# Altium PCB Shield_MCXC444 - PCB.PcbDoc (part 3 of 3)
Units mm, origin at the board's own origin, x right, y up, seen from the top; angles counter-clockwise.
Board outline 100 x 55 mm, 2 copper layers (Top Layer, Bottom Layer); 120 components, 83 nets, 361 pads, 693 vias.
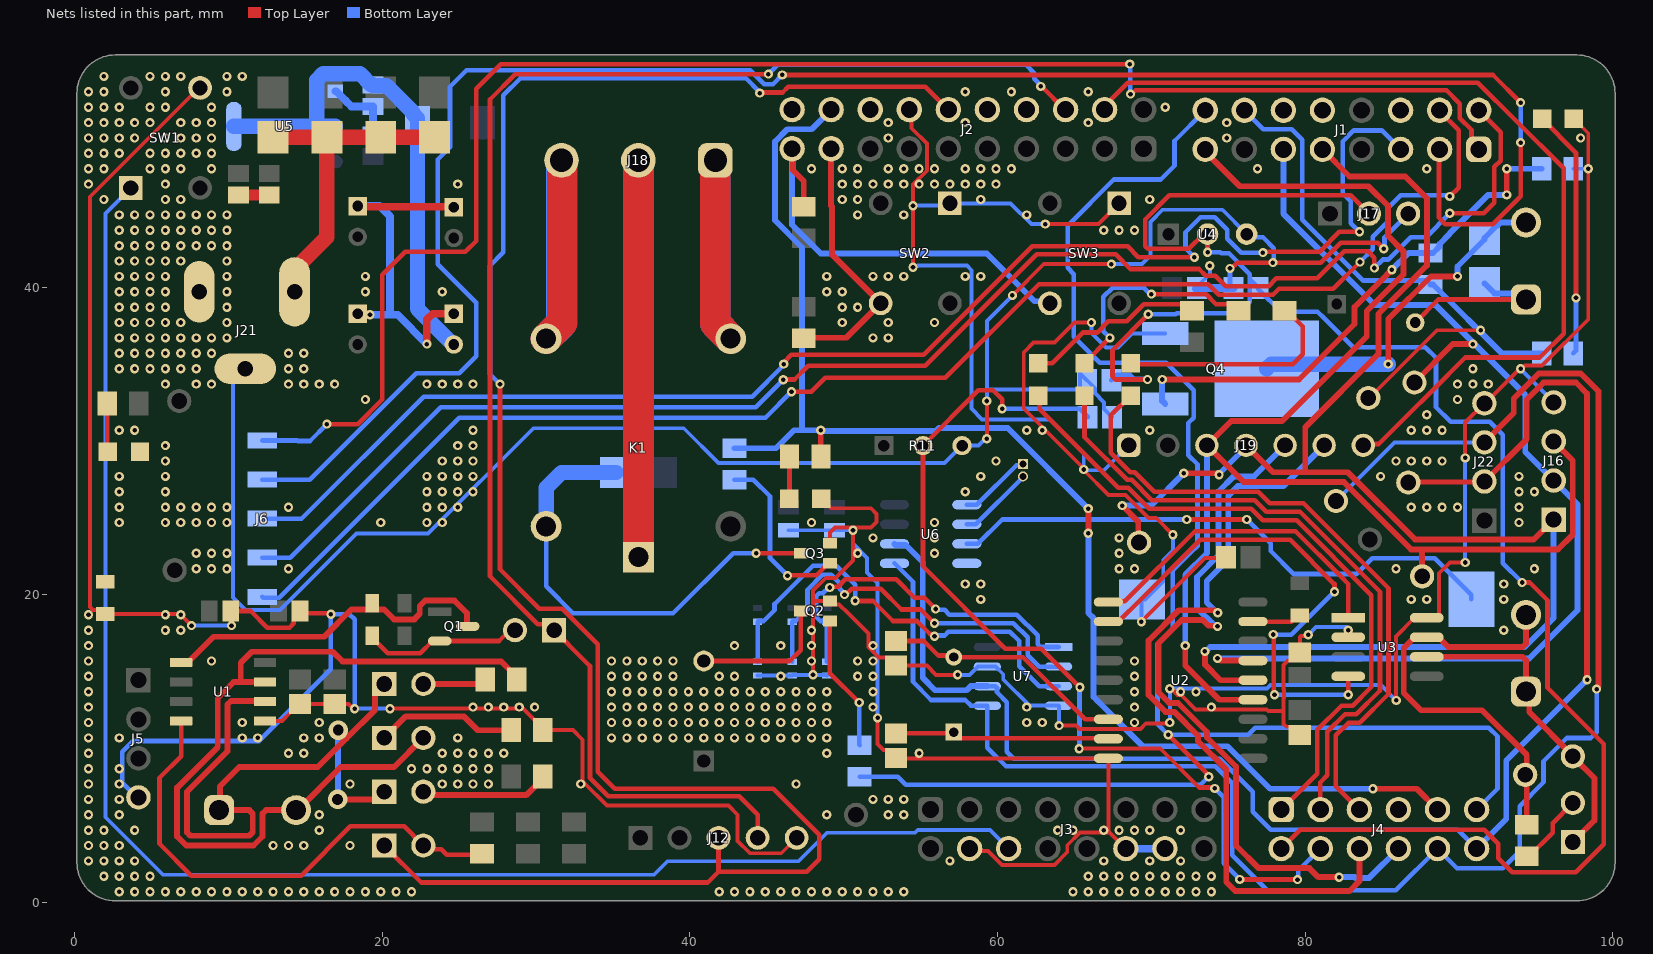
[diagram p2: the nets of this part, all layers, seen from the top]

## Via types
v1: diameter 0.6, hole 0.3, Top Layer to Bottom Layer, tented both sides, 543 vias
v2: diameter 0.6, hole 0.3, Top Layer to Bottom Layer, 148 vias
v3: diameter 1.27, hole 0.711, Top Layer to Bottom Layer, 2 vias

## Nets (pads, with @x,y where several pads share a name; then routed paths per layer and width w, separated by ;. In a path a pad name is that pad's centre, name@x,y a point inside that pad or via, vN(x,y) a via of type N, cw(c..) or ccw(c..) an arc to the next point about the centre after c; other vN are vias at no path point) (continued)
A0: R25.1 R28.2 U7.1 | length 23.2
  Top Layer w0.3: v2(49.088,20.473) 49.146,20.53 49.63,20.53 50.1,21 53.4,21 54.6,19.8 55.25,19.8 v2(55.971,19.079)
  Bottom Layer w0.3: R28.2@48.9,15.65 R25.1@48.9,18.25 48.85,18.3 48.465,18.3 48.196,18.569 48.196,19.896 48.408,20.108 48.642,20.108 49.007,20.473 v2(49.088,20.473) ; v2(55.971,19.079) 56.028,19.021 56.557,19.021 56.871,18.708 61.259,18.708 62.6,17.367 62.6,16.781 62.776,16.605 U7.1@63.968,16.605
A1: R26.1 R29.2 U7.2 | length 25.6
  Top Layer w0.3: v2(50.046,20.014) 50.127,20.014 50.513,20.4 52.4,20.4 53.754,19.046 55.008,19.046 v2(55.9,18.154)
  Bottom Layer w0.3: R29.2@46.65,15.65 R26.1@46.65,18.25 46.7,18.3 46.871,18.3 47.642,19.071 47.642,20.338 48.608,21.304 49.176,21.304 49.738,20.742 49.738,20.403 50.046,20.095 v2(50.046,20.014) ; v2(55.9,18.154) 61.029,18.154 61.954,17.229 61.954,16.081 62.7,15.335 U7.2@63.968,15.335
A2: R27.1 R30.2 U7.3 | length 29
  Top Layer w0.3: v2(50.74,19.616) 50.755,19.6 51.9,19.6 53.2,18.3 54.758,18.3 55.608,17.45 55.669,17.45 55.819,17.3 v2(55.9,17.3)
  Bottom Layer w0.3: R30.2@44.4,15.65 R27.1@44.4,18.25 44.45,18.3 44.8,18.3 45.5,19 45.5,19.4 48,21.9 49.5,21.9 50.74,20.66 v2(50.74,19.616) ; v2(55.9,17.3) 55.957,17.357 56.557,17.357 56.8,17.6 60.8,17.6 61.4,17 61.4,15.365 62.7,14.065 U7.3@63.968,14.065
AGND: C10.1 C11.1 C12.1 C13.1 C14.1 C15.2 C16.2 C17.1 C18.2 C19.2 C20.1 C21.1 D13.1 J17.3 J21.2 J21.3 R11.3 R24.1 U4.3 U5.1 | length 164.4
  Top Layer w0.254: v2(59.3,30.15) v2(59.3,32.6) ; v2(60.965,39.465) 63,41.5 v2(67.4,41.5)
  Top Layer w0.3: v2(75.109,41.218) 75.19,41.218 75.572,41.6 v2(77.9,41.6) 81.017,41.6 82.308,42.892 84.708,42.892 v2(85.1,42.5)
  Top Layer w0.5: C21.1@18.4,38.275 18.456,38.219 19.181,38.219 v2(19.2,38.2) ; C20.1@18.4,45.275 18.438,45.238 24.613,45.238 C14.1@24.65,45.2 ; v2(22.9,36.3) 22.9,37.9 23.275,38.275 C17.1@24.65,38.275
  Top Layer w0.7: C19.2@10.65,46 C18.2@12.65,46
  Bottom Layer w0.254: J21.3@11.1,34.7 10.3,33.9 10.3,19.82 11.097,19.023 13.353,19.023 18.315,23.985 22.985,23.985 29.827,30.827 39.596,30.827 41.852,28.571 56.561,28.571 R11.3@57.69,29.7 57.857,29.867 58.024,29.7 58.767,29.7 59.217,30.15 v2(59.3,30.15) ; v2(59.3,32.6) 59.3,33.352 ; v2(60.965,39.465) 59.3,37.8 59.3,33.352 ; v2(67.4,41.5) 69.4,41.5 69.95,42.05 69.95,44.25 70.731,45.031 74.609,45.031 U4.3@76.19,43.45 ; C13.1@67.45,31.55 66.927,32.073 66.927,32.509 66.323,33.113 66.323,33.427 65.35,34.4 65.35,33.425 65.277,33.352 59.3,33.352 ; C12.1@72.95,39.95 72.95,40.025 73.8,40.875 v2(73.8,41.4)
  Bottom Layer w0.3: v2(75.109,41.218) 75.109,40.191 C10.1@75.35,39.95 ; U4.3@76.19,43.45 76.4,43.24 77.256,43.24 77.954,42.542 77.954,41.654 v2(77.9,41.6) ; v2(85.1,42.5) 85.157,42.557 85.157,43.247 J17.3@86.69,44.78
  Bottom Layer w0.5: U5.1@16.945,52.74 17.011,52.74 17.621,52.13 17.621,52.104 17.975,51.75 C16.2@19.4,51.75 C15.2@19.4,49.9 ; C20.1@18.4,45.275 19.825,45.275 20.5,44.6 20.5,38.2 ; v2(19.2,38.2) 20.5,38.2 ; v2(22.9,36.3) 21,38.2 20.5,38.2 ; C14.1@24.613,45.238 C14.1@24.65,45.2 ; C12.1@72.9,39.9 C12.1@72.95,39.95 ; C12.1@73.15,39.95 C10.1@75.35,39.95
  other v1: 7.9,21.7 8.9,21.7 9.9,21.7 13.9,21.7 7.9,22.7 8.9,22.7 9.9,22.7 2.9,24.7 5.9,24.7 6.9,24.7 7.9,24.7 8.9,24.7 9.9,24.7 19.9,24.7 22.9,24.7 23.9,24.7 2.9,25.7 5.9,25.7 6.9,25.7 7.9,25.7 8.9,25.7 9.9,25.7 13.9,25.7 22.9,25.7 23.9,25.7 24.9,25.7 2.9,26.7 5.9,26.7 22.9,26.7 23.9,26.7 24.9,26.7 25.9,26.7 2.9,27.7 5.9,27.7 22.9,27.7 23.9,27.7 24.9,27.7 25.9,27.7 5.9,28.7 23.9,28.7 24.9,28.7 25.9,28.7 5.9,29.7 24.9,29.7 25.9,29.7 2.9,30.7 3.9,30.7 25.9,30.7 18.9,32.7 5.9,33.7 7.9,33.7 8.9,33.7 13.9,33.7 14.9,33.7 15.9,33.7 16.9,33.7 22.9,33.7 23.9,33.7 24.9,33.7 25.9,33.7 2.9,34.7 3.9,34.7 4.9,34.7 5.9,34.7 6.9,34.7 7.9,34.7 13.9,34.7 14.9,34.7 2.9,35.7 3.9,35.7 4.9,35.7 5.9,35.7 6.9,35.7 7.9,35.7 8.9,35.7 13.9,35.7 14.9,35.7 2.9,36.7 3.9,36.7 4.9,36.7 5.9,36.7 6.9,36.7 7.9,36.7 8.9,36.7 9.9,36.7 2.9,37.7 3.9,37.7 4.9,37.7 5.9,37.7 6.9,37.7 9.9,37.7 2.9,38.7 3.9,38.7 4.9,38.7 5.9,38.7 9.9,38.7 2.9,39.7 3.9,39.7 4.9,39.7 5.9,39.7 9.9,39.7 18.9,39.7 23.9,39.7 2.9,40.7 3.9,40.7 4.9,40.7 5.9,40.7 9.9,40.7 18.9,40.7 2.9,41.7 3.9,41.7 4.9,41.7 5.9,41.7 6.9,41.7 9.9,41.7 2.9,42.7 3.9,42.7 4.9,42.7 5.9,42.7 6.9,42.7 7.9,42.7 8.9,42.7 9.9,42.7 2.9,43.7 3.9,43.7 4.9,43.7 5.9,43.7 6.9,43.7 7.9,43.7 8.9,43.7 9.9,43.7 2.9,44.7 3.9,44.7 4.9,44.7 5.9,44.7 6.9,44.7 7.9,44.7 8.9,44.7 9.9,44.7 1.9,45.7 5.9,45.7 6.9,45.7 0.9,46.7 5.9,46.7 24.9,46.7 0.9,47.7 1.9,47.7 4.9,47.7 5.9,47.7 6.9,47.7 8.9,47.7 0.9,48.7 1.9,48.7 2.9,48.7 4.9,48.7 5.9,48.7 6.9,48.7 7.9,48.7 8.9,48.7 0.9,49.7 1.9,49.7 2.9,49.7 3.9,49.7 5.9,49.7 6.9,49.7 7.9,49.7 8.9,49.7 0.9,50.7 1.9,50.7 2.9,50.7 3.9,50.7 4.9,50.7 6.9,50.7 7.9,50.7 8.9,50.7 0.9,51.7 1.9,51.7 2.9,51.7 4.9,51.7 5.9,51.7 8.9,51.7 0.9,52.7 1.9,52.7 5.9,52.7 9.9,52.7 1.9,53.7 4.9,53.7 5.9,53.7 6.9,53.7 9.9,53.7 10.9,53.7
AREF: J2.16
CAN_N: J14.1 J15.1 TP8.1 U3.6 | length 20.8
  Top Layer w0.381: U3.6@87.9,15.97 94.127,15.97 94.35,15.747 J15.1@94.35,13.7 94.56,13.49 94.56,12.377 97.4,9.536 97.4,9.476 98.805,8.071 98.805,5.335 J14.1@97.4,3.93
CAN_P: J15.2 R10.1 TP7.1 U3.7 | length 27.6
  Top Layer w0.381: J15.2@94.35,18.7 94.35,16.828 94.127,16.605 89.295,16.605 88.66,17.24 87.102,17.24 86.407,16.546 86.407,13.616 87.523,12.5 91.495,12.5 94.4,9.595 94.4,8.3 R10.1@94.4,5.054
COMUN: J18.2 K1.1 | length 25.8
  Top Layer w2: K1.1@36.65,22.45 J18.2@36.65,48.25
DGND: BT1.1 C1.2 C2.2 C3.1 C4.1 C5.1 C6.1 C7.1 C8.1 C9.1 C22.2 C23.2 D5.1 D7.2 J2.14 J3.4 J3.12 J3.14 J5.4 J12.5 J16.4 J19.1 J22.4 Q2.2 Q3.2 Q4.3 R1.2 R22.2 R24.2 R28.1 R29.1 R30.1 SW1.4 SW2.1 SW3.1 U1.5 U2.9 U3.2 U3.8 U6.4 U7.4 U7.7 | length 414.5
  Top Layer w0.254: v2(7.6,18) 6.85,18.75 R24.2@2,18.75 1.731,19.019 1.188,19.019 1,19.208 1,45.879 8.071,52.95 SW1.4@8.15,52.95 ; C1.2@10.15,18.95 10.2,18.9 v2(10.2,18) ; U1.5@12.375,11.795 13.481,11.795 14.052,12.366 14.052,12.377 14.575,12.9 C4.1@14.65,12.9 C3.1@16.9,12.9 17.806,12.9 18.106,12.6 v2(18.2,12.6) ; v2(20.5,12.6) 20.518,12.618 29.158,12.618 30.425,11.35 R1.2@30.425,11.2 32.4,11.2 33.023,10.577 33.023,7.902 33.1,7.825 33.1,7.8 34.6,6.3 42.5,6.3 43.1,5.7 43.1,4 43.902,3.198 45.938,3.198 J12.5@46.94,4.2 ; v2(48,14.8) 48,19.5 ; D5.1@48.55,26.25 49.173,25.627 51.76,25.627 52.127,25.26 52.127,24.74 51.76,24.373 v2@50.6,24.373 ; Q3.2@49.1,23.35 49.1,24.047 49.426,24.373 v2@50.593,24.373 ; v2(50.6,24.2) 50.6,22.241 49.459,21.1 48.828,21.1 48,20.272 48,19.5 ; v2(52.2,12) 52.2,10.3 52.577,9.923 52.877,9.923 53.43,9.37 U2.9@67.2,9.37 67.2,4.64 67.288,4.552 ; J2.14@54.26,51.54 54.414,51.386 54.414,50.334 55.4,49.348 55.4,47.571 54.5,46.671 v2(54.5,45.3) v2(54.5,41.3) ; v2(57.4,14.8) 55.999,14.8 55.399,15.4 C9.1@53.4,15.4 52.877,15.923 52.277,15.923 51.6,16.6 51.6,17.475 50.298,18.777 49.698,19.377 49.323,19.377 Q2.2@49.1,19.6 48.1,19.6 48,19.5 ; J3.4@58.18,3.5 58.334,3.346 59.386,3.346 60.284,2.448 63.696,2.448 64.53,3.282 64.53,3.718 65.364,4.552 67.288,4.552 ; v2(63.1,44.1) 66.55,44.1 SW3.1@67.9,45.45 ; v2(64,11.5) 65.117,11.5 65.334,11.283 69.283,11.283 69.634,11.634 71.134,11.634 v2(71.2,11.7) ; v2(66.1,37.7) 65,37.7 63.7,36.4 62.338,36.4 61.7,35.762 61.7,32.1 65.6,28.2 v2(65.6,28.15) 65.6,28.1 67.207,26.493 68.307,26.493 69.817,24.983 70.317,24.983 v2(71.4,23.9) ; J3.12@68.34,3.5 67.288,4.552 ; v2(69.35,18.25) 69.35,18.263 73.487,22.4 74.7,22.4 74.75,22.45 C8.1@74.85,22.45 ; v2(71.2,13.9) 71.294,13.9 71.705,13.489 71.941,13.489 72.877,12.553 77.494,12.553 77.604,12.443 78.598,12.443 ; C7.1@79.65,10.9 79.127,11.423 78.776,11.423 78.598,11.601 78.598,12.443 ; v2(80.2,17.4) 80.134,17.334 79.733,17.334 79.65,17.251 C6.1@79.65,16.25 79.127,15.727 78.89,15.727 78.598,15.435 78.598,13.865 78.627,13.836 78.627,13.314 78.598,13.285 78.598,12.443 ; U3.2@82.798,17.24 82.8,17.242 v2(82.8,17.7) ; v2(85.912,13.134) 85.89,13.157 85.89,17.298 87.102,18.51 U3.8@87.9,18.51 88.536,18.51 88.7,18.674 88.7,21.4 89.4,22.1 v2(90.4,22.1) ; v2(90.4,28.9) 90.4,31.2 J22.4@91.65,32.45 91.7,32.45 v2@93.95,34.7 ; v2(94,34.7) 94.094,34.7 94.294,34.9 95.4,34.9 98.4,37.9 v2(98.4,47.7) 98.4,50.007 D7.2@97.457,50.95
  Top Layer w0.3: C1.2@10.15,18.95 11.454,18.95 12.533,17.871 13.967,17.871 14.25,18.154 14.25,18.55 C2.2@14.65,18.95 14.8,18.8 15.91,18.8 15.912,18.798 16.602,18.798 v2(16.66,18.74)
  Bottom Layer w0.254: v2(7.6,18) v2(10.2,18) ; v2(18.2,12.6) v2(20.5,12.6) ; R30.1@44.4,14.75 R29.1@46.65,14.75 46.675,14.775 47.975,14.775 v2(48,14.8) 48.025,14.775 48.875,14.775 R28.1@48.9,14.75 ; C23.2@46.4,24.2 C22.2@49.4,24.2 v2(50.6,24.2) 50.6,23.326 51.523,22.403 51.523,21.454 52.2,20.777 v2(52.2,12) ; v2(54.5,41.3) 54.566,41.366 54.788,41.366 54.822,41.4 58,41.4 58.3,41.1 58.3,32.1 59,31.4 63.4,31.4 65.6,29.2 v2(65.6,28.15) 65.65,28.1 66.915,28.1 J19.1@68.53,29.715 ; v2(54.5,45.3) 56.75,45.3 SW2.1@56.9,45.45 60.85,45.45 62.2,44.1 v2(63.1,44.1) ; v2(57.4,14.8) 58.18,14.8 58.715,15.335 U7.7@59.332,15.335 59.872,15.335 60.369,14.838 60.369,14.494 62.068,12.795 U7.4@63.968,12.795 64,12.763 v2(64,11.5) ; v2(66.1,37.7) 66.1,37.013 67.04,36.073 67.826,36.073 68.739,36.986 Q4.3@70.898,36.986 ; v2(69.35,18.25) 69.35,19.65 BT1.1@69.4,19.7 69.6,19.7 70.773,20.873 70.773,22.273 71.4,22.9 v2(71.4,23.9) ; v2(71.2,11.7) v2(71.2,13.9) ; v2@71.25,13.85 71.31,13.85 71.36,13.9 77.513,13.9 77.74,14.127 84.92,14.127 v2(85.912,13.134) ; v2(80.2,17.4) 80.7,17.9 82.651,17.9 82.8,17.751 v2(82.8,17.7) ; v2(90.4,22.1) v2(90.4,28.9) ; v2(94,34.7) 94,34.68 96.15,32.53 J16.4@96.15,32.51 ; R22.2@97.425,47.7 v2(98.4,47.7)
  Bottom Layer w0.3: J5.4@4.15,6.83 4.07,6.83 3.105,7.795 3.105,9.805 3.8,10.5 12,10.5 16.65,15.15 16.65,18.731 v2(16.66,18.74) ; v2@16.6,18.8 v2(16.66,18.74) ; v2(18.2,12.6) 18.2,18.4 17.86,18.74 v2(16.66,18.74)
  Bottom Layer w0.5: J3.12@68.34,3.5 J3.14@70.88,3.5
  other v1: 2.9,0.7 3.9,0.7 4.9,0.7 5.9,0.7 6.9,0.7 7.9,0.7 8.9,0.7 9.9,0.7 10.9,0.7 11.9,0.7 12.9,0.7 13.9,0.7 14.9,0.7 15.9,0.7 16.9,0.7 17.9,0.7 18.9,0.7 19.9,0.7 20.9,0.7 21.9,0.7 41.9,0.7 42.9,0.7 43.9,0.7 44.9,0.7 45.9,0.7 46.9,0.7 47.9,0.7 48.9,0.7 49.9,0.7 50.9,0.7 51.9,0.7 52.9,0.7 53.9,0.7 64.9,0.7 65.9,0.7 66.9,0.7 67.9,0.7 68.9,0.7 69.9,0.7 70.9,0.7 71.9,0.7 72.9,0.7 73.9,0.7 1.9,1.7 2.9,1.7 3.9,1.7 4.9,1.7 65.9,1.7 66.9,1.7 67.9,1.7 68.9,1.7 69.9,1.7 70.9,1.7 71.9,1.7 72.9,1.7 73.9,1.7 0.9,2.7 1.9,2.7 2.9,2.7 3.9,2.7 56.9,2.7 66.9,2.7 69.9,2.7 71.9,2.7 0.9,3.7 1.9,3.7 2.9,3.7 12.9,3.7 13.9,3.7 14.9,3.7 17.9,3.7 0.9,4.7 1.9,4.7 3.9,4.7 15.9,4.7 63.9,4.7 64.9,4.7 66.9,4.7 67.9,4.7 68.9,4.7 69.9,4.7 71.9,4.7 0.9,5.7 2.9,5.7 15.9,5.7 48.9,5.7 52.9,5.7 53.9,5.7 0.9,6.7 2.9,6.7 51.9,6.7 52.9,6.7 53.9,6.7 0.9,7.7 2.9,7.7 17.9,7.7 23.9,7.7 24.9,7.7 25.9,7.7 26.9,7.7 32.9,7.7 46.9,7.7 0.9,8.7 2.9,8.7 21.9,8.7 22.9,8.7 23.9,8.7 24.9,8.7 25.9,8.7 26.9,8.7 0.9,9.7 13.9,9.7 14.9,9.7 23.9,9.7 24.9,9.7 25.9,9.7 26.9,9.7 27.9,9.7 48.9,9.7 54.9,9.7 0.9,10.7 2.9,10.7 10.9,10.7 11.9,10.7 14.9,10.7 15.9,10.7 24.9,10.7 34.9,10.7 35.9,10.7 36.9,10.7 37.9,10.7 38.9,10.7 39.9,10.7 40.9,10.7 41.9,10.7 42.9,10.7 43.9,10.7 44.9,10.7 45.9,10.7 46.9,10.7 47.9,10.7 48.9,10.7 0.9,11.7 10.9,11.7 15.9,11.7 34.9,11.7 35.9,11.7 36.9,11.7 37.9,11.7 38.9,11.7 39.9,11.7 40.9,11.7 41.9,11.7 42.9,11.7 43.9,11.7 44.9,11.7 45.9,11.7 46.9,11.7 47.9,11.7 48.9,11.7 61.9,11.7 62.9,11.7 68.9,11.7 0.9,12.7 25.9,12.7 26.9,12.7 27.9,12.7 28.9,12.7 29.9,12.7 34.9,12.7 35.9,12.7 36.9,12.7 37.9,12.7 38.9,12.7 39.9,12.7 40.9,12.7 41.9,12.7 42.9,12.7 43.9,12.7 44.9,12.7 45.9,12.7 46.9,12.7 47.9,12.7 48.9,12.7 51.9,12.7 61.9,12.7 68.9,12.7 73.9,12.7 0.9,13.7 34.9,13.7 35.9,13.7 36.9,13.7 37.9,13.7 38.9,13.7 39.9,13.7 40.9,13.7 41.9,13.7 42.9,13.7 43.9,13.7 44.9,13.7 45.9,13.7 46.9,13.7 47.9,13.7 48.9,13.7 51.9,13.7 68.9,13.7 71.9,13.7 72.9,13.7 0.9,14.7 34.9,14.7 35.9,14.7 36.9,14.7 37.9,14.7 38.9,14.7 41.9,14.7 42.9,14.7 45.9,14.7 50.9,14.7 51.9,14.7 68.9,14.7 0.9,15.7 8.9,15.7 34.9,15.7 35.9,15.7 36.9,15.7 37.9,15.7 38.9,15.7 47.9,15.7 50.9,15.7 51.9,15.7 68.9,15.7 0.9,16.7 42.9,16.7 45.9,16.7 47.9,16.7 51.9,16.7 0.9,17.7 5.9,17.7 6.9,17.7 47.9,17.7 92.9,17.7 0.9,18.7 5.9,18.7 6.9,18.7 58.9,19.7 86.9,19.7 87.9,19.7 92.9,19.7 57.9,20.7 58.9,20.7 92.9,20.7 67.9,21.7 68.9,21.7 85.9,21.7 94.9,21.7 50.9,22.7 55.9,22.7 67.9,22.7 51.9,23.7 55.9,23.7 67.9,23.7 47.9,24.7 55.9,24.7 93.9,24.7 86.9,25.7 87.9,25.7 88.9,25.7 89.9,25.7 93.9,25.7 57.9,26.7 93.9,26.7 94.9,26.7 58.9,27.7 84.9,27.7 93.9,27.7 59.9,28.7 85.9,28.7 86.9,28.7 87.9,28.7 88.9,28.7 61.9,30.7 62.9,30.7 69.9,30.7 86.9,30.7 87.9,30.7 88.9,30.7 87.9,31.7 89.9,32.7 89.9,33.7 90.9,33.7 91.9,33.7 90.9,34.7 51.9,36.7 52.9,36.7 49.9,37.7 52.9,37.7 55.9,37.7 49.9,38.7 50.9,38.7 48.9,39.7 49.9,39.7 48.9,40.7 51.9,40.7 52.9,40.7 53.9,40.7 57.9,40.7 58.9,40.7 66.9,43.7 67.9,43.7 68.9,43.7 50.9,44.7 53.9,44.7 61.9,44.7 49.9,45.7 50.9,45.7 58.9,45.7 69.9,45.7 49.9,46.7 50.9,46.7 51.9,46.7 52.9,46.7 53.9,46.7 54.9,46.7 55.9,46.7 56.9,46.7 57.9,46.7 58.9,46.7 59.9,46.7 47.9,47.7 49.9,47.7 50.9,47.7 52.9,47.7 53.9,47.7 54.9,47.7 55.9,47.7 57.9,47.7 58.9,47.7 59.9,47.7 60.9,47.7 76.9,47.7 87.9,47.7 52.9,49.7 74.9,49.7 97.9,49.7 52.9,50.7 57.9,50.7 65.9,50.7 74.9,50.7 70.9,51.7 57.9,52.7 60.9,52.7 65.9,52.7
MISO: J1.11 J16.2 TP2.1 U2.15 | length 72.1
  Top Layer w0.381: v2(74.3,15.864) 74.359,15.864 74.503,15.72 U2.15@76.6,15.72 ; TP2.1@87.1,33.8 89.6,36.3 v2(90.9,36.3)
  Bottom Layer w0.381: v2(74.3,15.864) 94.564,15.864 97.7,19 97.7,25.88 J16.2@96.15,27.43 94.3,29.28 94.3,33 88.45,38.85 84.509,38.85 78.58,44.779 J1.11@78.58,48.96
MOSI: J1.9 J16.1 J19.4 TP1.1 U2.14 | length 99.4
  Top Layer w0.381: v2(68.1,25.8) 69.144,24.756 69.144,23.456 TP1.1@69.2,23.4 ; v2(72.1,27.9) 74.3,27.9 v2(74.4,27.8) ; v2(73.476,16.324) 73.495,16.305 73.495,15.452 74.497,14.45 U2.14@76.6,14.45 ; J19.4@76.15,29.715 77.901,27.965 80,27.965 ; J1.9@81.12,48.96 82.88,47.2 86.5,47.2 87.919,45.781 87.919,41.42 84.765,38.265 84.765,35.665 80,30.9 80,27.965 ; J16.1@96.15,24.89 94.851,23.591 87.146,23.591 82.772,27.965 80,27.965
  Bottom Layer w0.381: v2(68.1,25.8) 70,25.8 v2(72.1,27.9) ; v2(73.476,16.324) 73.536,16.324 73.821,16.609 94.266,16.609 96.15,18.492 J16.1@96.15,24.89 ; v2(74.4,27.8) 74.4,27.859 76.15,29.609 J19.4@76.15,29.715
NA: J18.1 K1.3 | length 24
  Top Layer w2: J18.1@41.65,48.25 41.65,37.65 K1.3@42.65,36.65
  Bottom Layer w2: J18.1@41.65,48.25 41.65,37.65 K1.3@42.65,36.65
NC: J18.3 K1.4 | length 24.1
  Top Layer w2: K1.4@30.65,36.65 31.7,37.7 31.7,48.023 31.698,48.025 31.698,48.202 J18.3@31.65,48.25
  Bottom Layer w2: K1.4@30.65,36.65 31.65,37.65 J18.3@31.65,48.25
NetBT1_2: BT1.2 U6.3 | length 36.9
  Top Layer w0.3: v2(72.296,24.9) v2(76.2,24.9)
  Bottom Layer w0.3: U6.3@58,23.315 58.715,23.315 60.296,24.896 67.292,24.896 67.296,24.9 v2(72.296,24.9) ; v2(76.2,24.9) 77.758,23.342 77.758,22.851 79.259,21.35 83.315,21.35 84.354,22.389 88.411,22.389 90.8,20 BT1.2@90.8,19.7
NetC16_1: C16.1 C17.2 D10.1 U5.2 U5.4 | length 33.3
  Bottom Layer w1: U5.4@10.355,50.45 15.8,50.45 ; U5.2@16.945,50.45 15.8,50.45 ; C17.2@24.65,36.275 24.601,36.275 22.29,38.586 D10.1@22.29,50.7 22.29,50.98 21.98,51.29 21.98,51.385 20.265,53.1 19.45,53.1 C16.1@19.4,53.15 19.275,53.15 18.549,53.876 16.153,53.876 15.743,53.466 15.743,50.507 15.8,50.45
NetD1_2: D1.2 K1.5 Q3.3 | length 30.3
  Top Layer w0.3: v2(44.3,22.704) 44.302,22.702 47.198,22.702 Q3.3@47.2,22.7
  Bottom Layer w0.3: K1.5@30.65,24.45 30.65,20.55 32.4,18.8 38.9,18.8 42.804,22.704 v2(44.3,22.704)
  Bottom Layer w1: K1.5@30.65,24.45 30.65,26.95 31.65,27.95 D1.2@35.2,27.95
NetD2_2: D2.2 R15.1 | length 11.8
  Top Layer w0.3: D2.2@62.65,35.05 63.55,35.05 65.55,37.05 66.469,37.05 67.195,37.776 68.386,37.776 69.51,38.9 72.225,38.9 R15.1@72.65,38.475
NetD3_2: D3.2 R16.1 | length 14.8
  Top Layer w0.3: D3.2@65.65,35.05 v2(67.3,36.7) ; v2(70,39.55) 70.002,39.548 73.555,39.548 74.203,38.9 75.225,38.9 R16.1@75.65,38.475
  Bottom Layer w0.3: v2(67.3,36.7) 67.3,36.726 66.88,37.146 66.88,39.372 67.478,39.97 69.499,39.97 69.919,39.55 v2(70,39.55)
NetD4_2: D4.2 R17.1 | length 14.9
  Top Layer w0.3: D4.2@68.65,35.05 68.7,35 71.069,35 71.073,34.996 79.199,34.996 79.832,35.63 79.832,37.444 78.8,38.475 R17.1@78.65,38.475
NetD5_2: D5.2 R19.1 | length 2.8
  Top Layer w0.3: D5.2@46.45,26.25 46.475,26.275 R19.1@46.475,29
NetD6_1: D6.1 F1.2 J20.1 | length 11
  Top Layer w0.3: F1.2@87.15,37.7 88.65,39.2 J20.1@94.35,39.2
  Bottom Layer w0.381: D6.1@91.65,40.25 92.3,39.6 93.95,39.6 J20.1@94.35,39.2
NetD6_2: D6.2 J20.2 Q4.4 | length 22.9
  Top Layer w0.381: v2(85.4,35) 85.4,37.927 88.173,40.7 v2(89.9,40.7)
  Bottom Layer w0.381: v2(89.9,40.7) 89.9,41.35 91.65,43.1 91.65,43.2 92.46,44.01 92.51,44.01 92.7,44.2 J20.2@94.35,44.2
  Bottom Layer w1: Q4.4@77.498,34.7 77.797,35 v2(85.4,35)
NetD7_1: D7.1 R21.2 | length 16.2
  Top Layer w0.3: D7.1@95.4,50.95 97.6,48.75 v2(97.6,39.3)
  Bottom Layer w0.3: R21.2@97.425,35.7 97.6,35.875 v2(97.6,39.3)
NetD8_2: D8.2 D9.2 D11.2 D12.2 J21.1 | length 21.4
  Top Layer w1: D8.2@12.9,49.75 D9.2@16.4,49.75 ; J21.1@14.3,39.7 14.3,41.15 16.4,43.25 D9.2@16.4,49.75 ; D12.2@23.4,49.75 D11.2@19.9,49.75 D9.2@16.4,49.75
NetD13_2: D13.2 R23.1 | length 3.2
  Top Layer w0.3: R23.1@2.125,32.45 2.131,32.444 2.131,29.319 D13.2@2.15,29.3
NetJ7_2: J7.2 R5.2 | length 4.2
  Top Layer w0.381: J7.2@22.67,14.2 26.399,14.2 R5.2@26.699,14.5
NetJ9_1: J9.1 R1.1 | length 9.2
  Top Layer w0.381: J9.1@20.13,10.7 21.53,12.1 25.3,12.1 26.2,11.2 R1.1@28.375,11.2
NetJ10_2: J10.2 R2.1 U1.4 | length 32.5
  Top Layer w0.3: U1.4@6.925,11.795 6.925,9.508 5.517,8.1 5.517,3.819 7.594,1.742 14.725,1.742 17.929,4.946 21.424,4.946 J10.2@22.67,3.7 22.913,3.457 23.843,3.457 24.2,3.1 26.397,3.1 R2.1@26.472,3.175
NetJ11_2: J11.2 R6.2 | length 8.4
  Top Layer w0.381: J11.2@22.67,7.2 22.893,6.977 29.353,6.977 30.425,8.05 R6.2@30.425,8.2
NetJ13_2: J13.2 Q1.2 R7.1 | length 10.5
  Top Layer w0.3: R7.1@19.35,17.35 19.35,17.2 20.35,16.2 22.467,16.2 23.267,17 Q1.2@23.74,17 27.586,17 28.286,17.7 J13.2@28.63,17.7
NetJ14_2: J14.2 R10.2 | length 4.8
  Top Layer w0.3: R10.2@94.4,3.003 94.55,3.003 96.093,4.545 96.093,5.163 J14.2@97.4,6.47
NetLS1_2: LS1.2 Q2.3 | length 9.3
  Top Layer w0.3: LS1.2@40.9,15.7 46.5,15.7 47.2,16.4 47.2,18.85 47.1,18.95 Q2.3@47.2,18.95
NetQ2_1: Q2.1 R12.1 | length 8.9
  Top Layer w0.3: Q2.1@49.1,18.3 49.1,14.9 v2(51,13)
  Bottom Layer w0.3: v2(51,13) 51,10.254 R12.1@51.028,10.225
NetQ3_1: Q3.1 R18.1 | length 11.5
  Top Layer w0.3: v2(46.346,21.242) 46.383,21.278 48.228,21.278 49,22.05 Q3.1@49.1,22.05
  Bottom Layer w0.3: R18.1@42.9,27.475 44.128,27.475 45.209,26.394 45.209,22.38 v2(46.346,21.242)
NetQ4_1: Q4.1 R20.1 R22.1 | length 33.8
  Top Layer w0.381: v2(70.7,34) 79.6,34 83.2,37.6 83.2,38.7 84.933,40.433 ; 84.933,40.435 v2(85.634,41.135) ; v2(93.1,46) v2(93.1,47.7)
  Bottom Layer w0.381: v2(70.7,34) 70.7,32.612 Q4.1@70.898,32.414 ; v2(85.634,41.135) 86.724,42.225 88.3,42.225 88.738,42.663 88.738,42.813 89.4,43.475 89.4,43.502 91.898,46 v2(93.1,46) ; v2(93.1,47.7) R22.1@95.375,47.7
NetR9_1: R9.1 U2.17 | length 3.2
  Top Layer w0.3: U2.17@76.6,18.26 79.11,18.26 79.5,18.65 R9.1@79.65,18.65
NetU2_1: U2.1 U3.1 | length 21.1
  Top Layer w0.3: U2.1@67.2,19.53 67.24,19.57 68.27,19.57 72.833,24.133 79.367,24.133 82.3,21.2 82.798,20.702 U3.1@82.798,18.51
NetU2_2: U2.2 U3.4 | length 34.5
  Top Layer w0.3: U2.2@67.2,18.26 67.85,18.26 68.566,18.976 68.576,18.976 73.179,23.579 79.021,23.579 81.9,20.7 v2(81.9,20.2) ; v2(77.927,17.417) 77.963,17.38 77.963,13.537 v2(78,13.5) ; U3.4@82,14.7 U3.4@82.798,14.7 82.8,14.698 v2(82.8,13.5)
  Bottom Layer w0.3: v2(77.927,17.417) 77.943,17.4 79.1,17.4 v2(81.9,20.2) ; v2(78,13.5) v2(82.8,13.5)
NetU6_1: U6.1 Y2.1 | length 4.7
  Bottom Layer w0.3: U6.1@58,25.855 58.655,25.855 61.229,28.429 61.579,28.429 Y2.1@61.65,28.5
NetU6_2: U6.2 Y2.2 | length 5
  Bottom Layer w0.3: U6.2@58,24.585 58.585,24.585 61.65,27.65 Y2.2@61.65,27.7
OSC1: C5.2 U2.8 Y1.1 | length 14
  Top Layer w0.3: C5.2@53.4,11 57.08,11 Y1.1@57.15,11.07 57.55,10.67 67.17,10.67 U2.8@67.2,10.64
OSC2: C9.2 U2.7 Y1.2 | length 15.9
  Top Layer w0.3: C9.2@53.4,17 55.204,17 56.15,16.054 57.046,16.054 Y1.2@57.15,15.95 61.65,15.95 65.69,11.91 U2.7@67.2,11.91
PTA1: J1.2 J6.4 | length 99.5
  Top Layer w0.3: v2(46.064,33.982) 46.081,34 46.8,34 47.7,34.9 55.294,34.9 62.544,42.15 67.669,42.15 68.635,41.184 73.097,41.184 73.531,40.75 74.15,40.75 74.829,40.071 77.625,40.071 78.125,40.571 80.771,40.571 82.538,42.338 84.087,42.338 84.5,41.924 v2(84.5,41.25) ; v2(89.4,44.8) 91.6,44.8 92.3,45.5 92.3,47.819 92.7,48.219 92.7,50.08 J1.2@91.28,51.5
  Bottom Layer w0.3: J6.4@12.187,22.41 14.01,22.41 23.8,32.2 41.974,32.2 41.977,32.203 43.823,32.203 43.826,32.2 44.281,32.2 v2(46.064,33.982) ; v2(84.5,41.25) 85.046,41.796 85.392,41.796 86.853,43.257 87.857,43.257 v2(89.4,44.8)
PTA2: J1.4 J6.5 | length 96
  Top Layer w0.3: v2(46.6,33.2) 47.9,33.2 48.8,34.1 56.596,34.1 62.696,40.2 73.686,40.2 74.369,39.517 77.907,39.517 78.294,39.904 81.832,39.904 v2(83.562,41.634) ; J1.4@88.74,51.5 88.74,51.42 89.969,50.191 89.969,46.469 v2(89.4,45.9)
  Bottom Layer w0.3: J6.5@12.187,19.87 12.257,19.8 13.3,19.8 25.016,31.516 44.916,31.516 v2(46.6,33.2) ; v2(83.562,41.634) 84.396,42.468 84.396,43.269 85.339,44.212 85.339,45.11 86.198,45.969 89.25,45.969 89.319,45.9 v2(89.4,45.9)
PTA4: J1.10
PTA5: J1.12
PTB0: C10.2 C11.2 J4.2 J17.2 U4.2 | length 121
  Top Layer w0.3: v2(69.75,34) 67.646,34 67.47,34.176 67.47,35.906 v2(69.8,38.236) ; U4.2@73.486,43.45 73.386,43.45 72.432,42.496 69.776,42.496 69.6,42.672 69.6,44.4 71.169,45.969 82.961,45.969 J17.2@84.15,44.78 ; v2@73.65,42.278 U4.2@73.65,43.45 ; J4.2@78.44,3.5 79.669,4.729 91.649,4.729 92.552,3.826 92.552,2.874 93.455,1.971 97.582,1.971 99.4,3.789 99.4,10.3 95.75,13.95 95.75,19.65 94.6,20.8 v2(94.1,20.8)
  Bottom Layer w0.3: C11.2@67.4,33.95 67.75,34.3 68.6,34.3 68.85,34.05 69.7,34.05 v2(69.75,34) ; v2(69.8,38.236) 71.577,38.236 71.641,38.3 75.646,38.3 76.404,39.058 76.404,40.45 76.404,40.842 75.042,42.204 74.551,42.204 74.477,42.278 v2(73.651,42.278) ; C10.2@76.45,40.45 C10.2@76.95,39.95 76.95,39.875 78.425,38.4 80.8,38.4 81.025,38.175 81.042,38.175 83.117,36.1 87.8,36.1 88.5,35.4 88.5,32.2 89.449,31.251 92.005,31.251 92.849,30.407 92.849,22.051 v2(94.1,20.8)
PTB1: C13.2 J4.4 R11.2 | length 61.5
  Top Layer w0.254: v2(65.3,10) 66.303,10 66.306,9.997 70.574,9.997 73.1,7.471
  Top Layer w0.3: v2(60.293,32.093) 60.293,32.707 59.7,33.3 58.75,33.3 R11.2@55.15,29.7 55.15,21.85 60.496,16.504 62.832,16.504 v2(65.352,13.984) ; 73.1,7.471 74.067,7.471 v2(74.12,7.417) ; v2(75.75,1.5) 75.757,1.493 79.493,1.493 v2(79.5,1.486)
  Bottom Layer w0.3: v2(60.293,32.093) 65.35,32.093 65.85,31.593 C13.2@65.85,31.55 ; v2(65.3,10) 65.326,10.026 65.326,13.958 v2(65.352,13.984) ; v2(74.12,7.417) 74.696,6.842 74.696,2.553 v2(75.75,1.5) ; v2(79.5,1.486) 79.557,1.543 79.557,2.077 J4.4@80.98,3.5
PTB2: J4.6 J19.6 | length 50.9
  Top Layer w0.381: v2(74.319,18.834) 74.266,18.834 74.1,19 71.784,19 69.821,17.037 69.821,13.481 70.911,12.39 71.486,12.39 73.032,10.844 73.032,10.489 74.865,8.657 74.865,1.331 75.455,0.742 82.877,0.742 83.52,1.385 J4.6@83.52,3.5
  Bottom Layer w0.381: v2(74.319,18.834) 74.266,18.834 73.6,19.5 73.6,20.9 75,22.3 75,26.449 75.616,27.065 78.58,27.065 J19.6@81.23,29.715
PTB3: J4.8 J19.5 | length 48
  Top Layer w0.381: v2(74.3,17.946) 74.258,17.988 73.71,17.988 73.333,18.365 71.97,18.365 70.456,16.85 70.456,13.668 71.152,12.971 71.727,12.971 73.613,11.085 73.613,10.73 75.5,8.843 75.5,3.7 76.97,2.231 80.269,2.231 80.855,1.645 v2(82.2,1.645)
  Bottom Layer w0.381: v2(74.3,17.946) 74.241,17.946 74.131,18.056 74.044,18.056 72.965,19.135 72.965,21.163 74.365,22.563 74.365,26.712 75.353,27.7 76.675,27.7 J19.5@78.69,29.715 ; v2(82.2,1.645) 83.218,1.645 83.262,1.6 84.16,1.6 J4.8@86.06,3.5
PTB16: J2.19 R13.1 SW3.4 | length 27.9
  Top Layer w0.381: J2.19@46.64,49 46.697,48.943 46.697,47.603 47.4,46.9 R13.1@47.4,45.225
  Bottom Layer w0.381: J2.19@46.64,49 46.64,44.057 48.507,42.19 59.293,42.19 62.399,39.084 63.266,39.084 SW3.4@63.4,38.95
PTB17: J2.17 R14.1 SW2.4 | length 17.3
  Top Layer w0.381: R14.1@47.4,36.675 47.438,36.712 50.162,36.712 SW2.4@52.4,38.95 49.244,42.106 49.244,45.227 49.18,45.292 J2.17@49.18,49
PTB18: J1.1 J6.1 | length 104.4
  Top Layer w0.3: v2(16.4,31.1) 18.4,31.1 20,32.7 20,40.8 21.5,42.3 25.4,42.3 26.1,43 26.1,52.9 27.7,54.5 v2(68.6,54.5) ; v2(68.642,52.55) 68.724,52.55 68.966,52.793 89.185,52.793 90.051,51.927 90.051,50.991 90.807,50.235 90.807,49.433 J1.1@91.28,48.96
  Bottom Layer w0.3: J6.1@12.187,30.03 14.47,30.03 14.5,30 15.3,30 v2(16.4,31.1) ; v2(68.6,54.5) 68.621,54.479 68.621,52.571 v2(68.642,52.55)
PTB19: J1.3 J6.2 | length 124.3
  Top Layer w0.3: v2(46,53.8) 46.007,53.793 92.207,53.793 v2(94,52) ; J1.3@88.74,48.96 88.696,48.916 88.696,44.508 89.108,44.096 92.196,44.096 94,45.9 v2(94,49.4)
  Bottom Layer w0.3: J6.2@12.187,27.49 15.29,27.49 22.2,34.4 25,34.4 26.1,35.5 26.1,39 23.6,41.5 23.6,48.3 24.4,49.1 24.4,53.024 25.476,54.1 43.931,54.1 44.831,53.2 45.4,53.2 v2(46,53.8) ; v2(94,49.4) v2(94,52)
PTC0: J1.5 J6.3 | length 94.7
  Top Layer w0.3: v2(46.1,35) 46.1,35.1 46.6,35.6 55.21,35.6 62.26,42.65 68.45,42.65 69.158,41.942 v2(72.797,41.942) ; v2(77.25,42.25) 77.304,42.304 80.937,42.304 82.224,43.591 82.562,43.591 82.567,43.596 v2(83.525,43.596)
  Bottom Layer w0.3: J6.3@12.187,24.95 14.75,24.95 22.686,32.886 44.047,32.886 46.1,34.938 v2(46.1,35) ; v2(72.797,41.942) 72.791,41.942 72.214,42.519 72.214,43.575 73.193,44.554 74.107,44.554 74.939,43.722 74.939,43.139 75.829,42.25 v2(77.25,42.25) ; v2(83.525,43.596) 82.961,44.16 82.961,45.57 82.431,46.1 82.431,49.469 83.151,50.189 84.971,50.189 J1.5@86.2,48.96
PTC1: J4.12 J22.2 TP6.1 U6.6 U7.6 | length 102.3
  Top Layer w0.3: TP6.1@86.7,27.3 86.735,27.335 91.315,27.335 91.465,27.185 J22.2@91.65,27.37
  Top Layer w0.381: J22.2@91.65,27.37 94.4,30.12 94.4,32.7 95.5,33.8 97.6,33.8 98.323,33.077 v2(98.323,14.477)
  Bottom Layer w0.3: U7.6@59.332,14.065 59.852,14.065 59.964,13.953 59.964,13.659 60.6,13.023 60.6,9.8 61.05,9.35 74.45,9.35 76.6,7.2 76.6,5.9 77.771,4.729 89.911,4.729 J4.12@91.14,3.5
  Bottom Layer w0.381: U6.6@53.3,23.315 53.372,23.243 54.022,23.243 55.135,22.13 55.135,14.6 55.935,13.8 57.988,13.8 58.253,14.065 U7.6@59.332,14.065 ; J4.12@91.14,3.5 93.07,5.43 93.07,9.225 v2(98.323,14.477)
PTC2: J4.10 J22.3 TP4.1 U6.5 U7.5 | length 114.2
  Top Layer w0.381: J22.3@91.65,29.91 93.559,31.819 93.559,32.757 95.184,34.382 97.916,34.382 99.067,33.231 99.067,14.053 98.943,13.929 v2(98.943,13.87)
  Bottom Layer w0.254: TP4.1@82,26.1 85.81,29.91 J22.3@91.65,29.91
  Bottom Layer w0.3: U6.5@53.3,22.045 54.5,20.845 54.5,14.337 55.672,13.165 57.9,13.165 58.253,12.812 58.253,12.795 U7.5@59.332,12.795 59.332,10.068 60.55,8.85 74.15,8.85 75.25,7.75 75.25,3.073 77.541,0.782 85.882,0.782 J4.10@88.6,3.5 89.87,2.231 92.831,2.231 93.935,3.335 93.935,6.254 95.489,7.807 95.489,9.17 97.008,10.689 98.566,10.689 98.943,11.066 v2(98.943,13.87)
PTC5: J1.15 J16.3 J19.3 TP3.1 U2.13 | length 92.2
  Top Layer w0.381: v2(72.2,16.7) 72.2,15.4 74.42,13.18 U2.13@76.6,13.18 ; J1.15@73.5,48.96 73.5,48.8 75.735,46.565 84.104,46.565 85.379,45.289 85.379,43.341 86.378,42.342 86.378,40.827 84,38.448 84,36.8 78.5,31.3 75.195,31.3 J19.3@73.61,29.715 75.996,27.33 82.509,27.33 86.883,22.956 87.6,22.956 ; TP3.1@87.6,21.2 87.6,22.956 ; J16.3@96.15,29.97 97.39,28.731 97.39,23.911 96.434,22.956 87.6,22.956
  Bottom Layer w0.381: v2(72.2,16.7) 72.2,21.3 73.61,22.71 J19.3@73.61,29.715
PTD2: J2.4 J19.7 | length 59.8
  Top Layer w0.3: J2.4@66.96,51.54 66.96,51.787 68.466,53.293 91.225,53.293 93.7,50.818 96.8,47.718 96.8,36.975 95.255,35.43 90.411,35.43 88.289,33.308 86.609,31.628 84.789,29.807 83.862,29.807 J19.7@83.77,29.715
PTD3: J1.6
PTD4: J2.6 J12.4 J13.1 | length 100.4
  Top Layer w0.3: J12.4@44.4,4.2 44.4,5.7 43.2,6.9 34.7,6.9 33.5,8.1 33.5,15.37 30.781,18.089 30.111,18.089 27,21.2 27,52.2 28.65,53.85 v2(45.1,53.85) ; v2(62.8,53.05) 62.855,53.05 64.365,51.54 J2.6@64.42,51.54
  Bottom Layer w0.3: v2(45.1,53.85) 45.7,54.45 61.85,54.45 62.389,53.911 62.389,53.543 62.8,53.131 v2(62.8,53.05)
PTD5: J2.12 J10.1 J12.3 | length 128.5
  Top Layer w0.3: J10.1@20.13,3.7 22.534,1.296 41.156,1.296 41.86,2 ; v2(27.65,33.7) 27.65,21.65 30.2,19.1 31.694,19.1 34,16.794 34,8.5 35.1,7.4 45.407,7.4 48.4,4.407 48.4,2.8 47.6,2 41.86,2 ; J12.3@41.86,4.2 41.86,2 ; v2(44.542,52.618) 44.582,52.657 46.019,52.657 46.402,53.04 55.3,53.04 J2.12@56.8,51.54
  Bottom Layer w0.3: v2(27.65,33.7) 27,34.35 27,41.398 27.875,42.273 27.875,52.475 29,53.6 43.619,53.6 44.542,52.677 v2(44.542,52.618)
PTD6: J2.8
PTD7: J2.10
PTE0: J2.18 J4.9 R18.2 R19.2 | length 89.3
  Top Layer w0.381: v2(48.5,30.7) 48.5,29.025 R19.2@48.525,29 ; v2(65.9,24) v2(65.9,25.604) ; v2(84.4,7.396) 87.244,7.396 J4.9@88.6,6.04
  Bottom Layer w0.381: R18.2@42.9,29.525 45.591,29.525 46.765,30.7 47.29,30.7 v2(48.5,30.7) 48.54,30.659 56.001,30.659 56.182,30.84 60.664,30.84 v2(65.9,25.604) ; 47.2,30.7 47.29,30.79 47.29,42.585 45.525,44.351 45.525,49.462 46.333,50.27 47.911,50.27 J2.18@49.18,51.54 ; v2(65.9,24) 65.9,18.82 66.245,18.476 66.245,13.356 69.444,10.156 74.944,10.156 77.704,7.396 v2(84.4,7.396)
PTE1: J2.20
PTE20: D2.1 J4.1 | length 44.3
  Top Layer w0.3: D2.1@62.65,32.95 62.734,32.866 62.734,32.076 65.286,29.523 67.839,26.97 68.505,26.97 69.871,25.604 76.492,25.604 77.249,24.846 79.437,24.846 84.304,19.979 84.304,14.009 83.092,12.796 82.358,12.796 80.779,11.217 80.779,8.379 J4.1@78.44,6.04
PTE21: D3.1 J4.3 | length 42.3
  Top Layer w0.3: D3.1@65.65,32.95 65.65,30.237 68.417,27.47 68.712,27.47 70.024,26.158 76.721,26.158 77.474,25.405 79.661,25.405 84.858,20.209 84.858,13.779 83.321,12.242 82.587,12.242 81.442,11.097 81.442,8.259 80.98,7.797 J4.3@80.98,6.04
PTE22: D4.1 J4.5 | length 42.8
  Top Layer w0.3: D4.1@68.65,32.95 67.366,31.666 67.366,29.228 68.624,27.97 68.919,27.97 70.177,26.712 76.951,26.712 77.703,25.959 79.891,25.959 85.412,20.438 85.412,13.55 83.551,11.688 82.817,11.688 81.996,10.867 81.996,7.564 J4.5@83.52,6.04
PTE23: J4.7
PTE29: J1.14 R20.2 R21.1 TP9.1 | length 38
  Top Layer w0.254: TP9.1@84.1,32.8 84.163,32.8 88.563,37.2 v2(91.4,37.2)
  Bottom Layer w0.3: J1.14@76.04,51.5 77.269,50.271 79.129,50.271 79.299,50.101 79.809,49.591 79.809,44.391 83.769,40.431 87.894,40.431 R20.2@88.15,40.175
  Bottom Layer w0.381: R20.2@88.15,40.175 88.3,40.175 92.775,35.7 R21.1@95.375,35.7
PTE30: J1.16 J4.11 R12.2 | length 107.9
  Top Layer w0.3: v2(71.1,10.9) 73.668,8.332 73.668,8.232 v2(73.725,8.175)
  Bottom Layer w0.3: R12.2@51.028,8.175 53.5,8.175 54.025,7.65 73.189,7.65 73.714,8.175 v2(73.725,8.175) ; J1.16@73.5,51.5 71.5,49.5 71.5,47.893 70.607,47 67.556,47 64.55,43.994 64.55,41.253 64.95,40.853 64.95,36.782 66.653,35.079 70.977,35.079 72.747,33.309 72.747,31.519 72.4,31.172 72.4,29.072 73,28.472 73,23.176 72.824,23 72.8,23 71.4,21.6 71.4,17.8 70.4,16.8 70.4,11.581 71.081,10.9 75.3,10.9 76.3,10.9 76.759,11.359 91.941,11.359 92.5,10.8 92.5,7.4 J4.11@91.14,6.04
RESET_B: J3.6 SW1.1 | length 103.6
  Bottom Layer w0.254: SW1.1@3.65,46.45 3.007,45.807 2,44.8 2,5.537 5.737,1.8 37.671,1.8 38.552,2.681 47.056,2.681 48.909,4.534 54.641,4.534 54.813,4.706 59.514,4.706 J3.6@60.72,3.5
RO: Q1.3 R8.1 U1.1 | length 22.7
  Top Layer w0.381: U1.1@6.925,15.605 7.35,15.605 9.021,17.277 16.224,17.277 17.988,19.04 19.09,19.04 R8.1@19.35,19.3 ; R8.1@19.35,19.45 R8.1@19.35,19.3 ; Q1.3@25.56,17.95 25.56,17.99 25.509,18.041 25.509,18.81 24.686,19.633 22.794,19.633 22.439,19.279 22.439,18.76 22.084,18.405 20.757,18.405 20.122,19.04 19.61,19.04 R8.1@19.35,19.3
RS485_N: J7.1 J8.1 J11.1 U1.6 | length 44.1
  Top Layer w0.381: U1.6@12.375,13.065 12.34,13.1 10.158,13.1 9.935,12.877 9.935,9.835 7.3,7.2 7.3,4.558 7.523,4.335 11.359,4.335 11.582,4.558 11.582,5.777 11.359,6 J8.1@9.4,6 9.446,6.046 9.446,7.546 10.7,8.8 15.8,8.8 17.668,10.668 ; v3(17.1,6.7) 19.63,6.7 J11.1@20.13,7.2 ; v3(17.136,11.2) 17.668,10.668 ; J7.1@20.13,14.2 19.536,13.605 19.536,12.536 17.668,10.668
  Bottom Layer w0.381: v3(17.1,6.7) 17.118,6.718 17.118,11.182 v3(17.136,11.2)
RS485_P: J8.2 J9.2 R5.1 U1.7 | length 53.9
  Top Layer w0.381: U1.7@12.375,14.335 10.8,14.335 ; J9.2@22.67,10.7 20.77,8.8 17.3,8.8 14.5,6 J8.2@14.4,6 12.441,6 12.217,5.777 12.217,4.295 11.622,3.7 9,3.7 7.26,3.7 6.665,4.295 6.665,7.463 9.3,10.098 9.3,13.298 10.337,14.335 10.8,14.335 ; R5.1@28.75,14.5 28.75,14.65 27.732,15.669 22.7,15.669 22.691,15.66 17.422,15.66 16.786,16.295 11.518,16.295 10.8,15.577 10.8,14.335
pads on no net: J1.13 J2.1 J2.3 J2.5 J2.7 J2.9 J2.11 J2.13 J2.15 J3.1 J3.2 J3.3 J3.5 J3.7 J3.9 J3.11 J3.13 J3.15 R25.2 R26.2 R27.2 SW1.2 SW1.3 SW2.2 SW2.3 SW3.2 SW3.3 U2.3 U2.4 U2.5 U2.6 U2.10 U2.11 U3.5 U6.7

## Polygon pours and split planes (outlines as drawn)
AGND on Bottom Layer "AGND_L02_P006" (solid, remove dead copper, pour order 6): 28,55.546 -0.776,55.546 -0.776,21.046 20.724,21.046 28,28.322
AGND on Bottom Layer "AGND_L02_P010" (solid, remove dead copper, pour order 10): 46,26 46.145,25.855 56.351,25.855 59.996,29.5 67.5,29.5 69.5,31.5 69.5,37 71.558,39.058 78.558,39.058 79.5,40 79.5,48 65,48 58,41 58,33 47,33 44.5,30.5 44.5,26
DGND on Bottom Layer "DGND_L02_P007" (solid, remove dead copper, pour order 7): 26.337,20.288 28,18.625 28.037,18.662 45.17,18.662 45.17,18.695 46.4,19.925 45.763,20.562 45.763,54.788 100.263,54.788 100.263,-0.212 0.263,-0.212 0.263,20.288
+12V on Bottom Layer "+12V_L02_P003" (solid, remove dead copper, pour order 3): 43.75,21.25 45.25,22.75 45.25,33 44.25,34 35.75,34 32.75,31 32.75,22.25 33.75,21.25
+5V on Bottom Layer "+5V_L02_P001" (solid, remove dead copper, pour order 1): 10.25,46.25 15.5,46.25 15.5,48.25 17.75,50.5 23,50.5 24.25,51.75 24.25,55 10.5,55 9.5,54 9.5,47
+12V on Bottom Layer "+12V_L02_P000" (solid, remove dead copper, pour order 0): 15.5,48.25 16.5,49.25 20.75,49.25 21.75,48.25 21.75,45.75 23,44.5 26.5,44.5 27,44 27,42.5 26.5,42 18,42 17.5,41.5 17.5,38.5 18,38 20,38 20.5,37.5 20.5,35 20,34.5 16,34.5 15.5,35
DGND on Top Layer "DGND_L01_P009" (solid, remove dead copper, pour order 9): 43.3,20.5 45.9,23.1 45.9,53.6 47.8,55.5 101,55.5 101,0.5 100.5,0 0,0 0,20.5
AGND on Top Layer "AGND_L01_P008" (solid, remove dead copper, pour order 8): 28,20 28.8,20.8 28.8,55.5 0,55.5 0,20
NetD6_2 on Top Layer "NETD6_2_L01_P002" (solid, remove dead copper, pour order 2): 87.914,39.75 87.914,39.55 85.75,37.386 85.75,33.25 85,32.5 82.25,32.5 80.745,34.005 80.745,42.995 84.5,46.75 97.25,46.75 97.25,41.75 92.5,41.75 90.5,39.75
NetD6_1 on Top Layer "NETD6_1_L01_P005" (solid, remove dead copper, pour order 5): 92.75,32.5 96.75,36.5 96.75,41.25 95.75,42.25 86.85,42.25 85,40.4 85,32.5
NetD8_2 on Top Layer "NETD8_2_L01_P004" (solid, remove dead copper, pour order 4): 11,37.25 11.75,36.5 16.75,36.5 17.5,37.25 17.5,46 19.25,47.75 24.5,47.75 25.75,49 25.75,51 24.5,52.25 12.5,52.25 11,50.75

## Other copper
Top Layer:
  text "MCXC444-SHIELD / Adscripción 2025 / Agustin Zuliani - Daniel Márquez / V:01 Rev: 00" at 7.3,27.122 h1

## Silkscreen, mask and mechanical layers (free items; w line width, h text height)
Top Overlay:
  drawing of 58 lines, arcs and shapes, not listed
  text "NA    COMUN    NC" at 44.15,54.825 h1.5 r180
  text "RESET" at 0.92,51.504 h1.5 r270
  text "MOSFET" at 99.415,48 h1.25 r90
  text "LM35" at 76.25,46.086 h1.25
  text "+5V SEÑAL GND" at 79.9,41.45 h1
  text "IN      OUT" at 99.525,37.7 h1.5 r90
  text "SPI OLED" at 73.25,31.34 h1.25
  text "PTB18" at 0.791,27.041 h1.25
  text "PTB19" at 0.791,25.789 h1.25
  text "PTC0" at 0.791,24.526 h1.25
  text "PTA1" at 0.792,23.287 h1.25
  text "3V3  SCL  SDA  GND" at 90.15,23.2 h1.1 r90
  text "MOSI MISO SCK GND" at 99.8,23.2 h1.1 r90
  text "PTA2" at 0.791,22.048 h1.25
  text "+12V +5V 3V3 GND" at 0.4,16.14 h1.25 r270
  text "CAN  / MCP2515" at 60.321,14.614 h1.25
  text "CANL   CANH" at 99.525,11.2 h1.5 r90
  text "RS485" at 0.75,2.085 h2
  text "+5V 3V3 TX RX GND" at 35.055,0.95 h1.5
  text "A    B" at 8.4,0.416 h2.5
Bottom Overlay:
  lines w0.254: 55,18.5 52,18.5 51.25,19.25 51.25,32.5 51.25,32.75 51.75,33.25 59,33.25 60.5,33.25 61,32.75 61,31.25 61.25,31 62.75,31 63.5,30.25 63.5,24 ; 55.5,8 55.5,18.5 57.25,20.25 59.5,20.25 ; 66,8 66,11
  text "RTC / DS1307" at 60.354,27.091 h1.25
  text "EEPROM / AT24C" at 63.84,9.591 h1.25
Mechanical 1:
  lines w0.1: 0.146,2.601 ccw(c2.646,2.601) 2.646,0.101 97.646,0.101 ccw(c97.646,2.601) 100.146,2.601 100.146,52.601 ccw(c97.646,52.601) 97.646,55.101 2.646,55.101 ccw(c2.646,52.601) 0.146,52.601 0.146,2.601 ; 59.9,19.2 59.9,23.45 65.15,23.45 65.15,23.2 65.15,19.2 59.9,19.2 ; 82.4,7.95 82.4,10.7 91.9,10.7 91.9,7.95 82.4,7.95
  lines w0.254: 0.146,2.601 ccw(c2.646,2.601) 2.646,0.101 97.646,0.101 ccw(c97.646,2.601) 100.146,2.601 100.146,52.601 ccw(c97.646,52.601) 97.646,55.101 2.646,55.101 ccw(c2.646,52.601) 0.146,52.601 0.146,2.601